# EAGLE board single breakout (EAGLE 9.3.0)
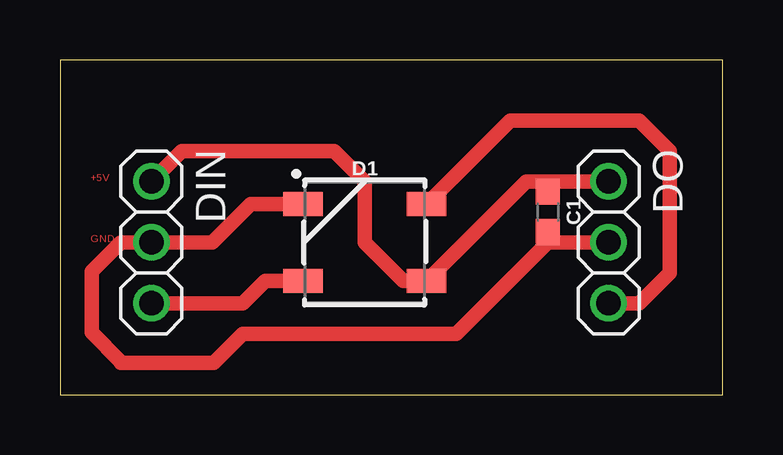
[diagram p0: board, top side]

Size 27.61 x 13.96 mm. Coordinates in mm from the lower left corner, seen from the top.
Outline: 0,0 27.61,0 27.61,13.96 0,13.96 0,0
Copper layers (1*16): Top 0.035mm / dielectric 1.5mm / Bottom 0.035mm
Design rules "default": minimum track width 6mil, minimum drill 0.35mm, track to track 6mil, track to pad 6mil, pad to pad 6mil, via to via 6mil, smd to smd 6mil, copper to edge 40mil, drill to drill 6mil, minimum pad ring 10mil, minimum via ring 8mil, stop-mask expansion 4mil, vias tented up to drill 0mil, thermal gap 10mil

## Footprints (pad centres in the part's own frame; a part is rotated, then mirrored left to right if it is on the bottom)
0603 = smd 1.1 x 1: 1 -0.85,0; 2 0.85,0
WS2812B = smd 1.651 x 1: 1 2.577,-1.6; 2 2.577,1.6; 3 -2.577,1.6; 4 -2.577,-1.6
1X03 = drill 1.016: 1 -2.54,0; 2 0,0; 3 2.54,0

## Placement (x,y rotation side)
C1  180pF  [0603]  20.32,7.62 270 top
D1  WS2812B  [WS2812B]  12.7,6.35 0 top
DIN  [1X03]  3.81,6.35 270 top
DO  [1X03]  22.86,6.35 270 top

## Library data of the parts
C1 = SparkFun-Capacitors; PROD_ID: CAP-11661
D1 = SparkFun-LED; PROD_ID: DIO-12503
DIN DO = adafruit

## Nets
+5V: C1.1 D1.1 DIN.1 DO.1
DIN: D1.4 DIN.3
DO: D1.2 DO.3
GND: C1.2 D1.3 DIN.2 DO.2

## Tracks (layer width: path | path; a pad name or v marks a point on that pad's centre or on a via)
+5V
  Top 0.61: DIN.1 5.08,10.16 11.43,10.16 12.7,8.89 12.7,6.35 14.3,4.75 D1.1 19.42,8.89 20.32,8.89 | 20.32,8.89 DO.1 | C1.1 20.32,8.89
DIN
  Top 0.61: D1.4 8.56,4.75 7.62,3.81 DIN.3
DO
  Top 0.61: D1.2 18.76,11.43 24.13,11.43 25.4,10.16 25.4,5.08 24.13,3.81 DO.3
GND
  Top 0.61: D1.3 7.95,7.95 6.35,6.35 DIN.2 2.54,6.35 1.32,5.13 1.32,2.59 2.54,1.37 2.54,1.32 6.4,1.32 7.62,2.54 16.51,2.54 20.32,6.35 | 20.32,6.35 DO.2 | C1.2 20.32,6.35

## Text on the board
Top: +5V | GND